# Altium PCB Receptor32DV1.0.PcbDoc
Units mm, origin at the board's own origin, x right, y up, seen from the top; angles counter-clockwise.
Board outline 400 x 50 mm, 2 copper layers (Top Layer, Bottom Layer); 33 components, 88 nets, 160 pads, 31 vias.
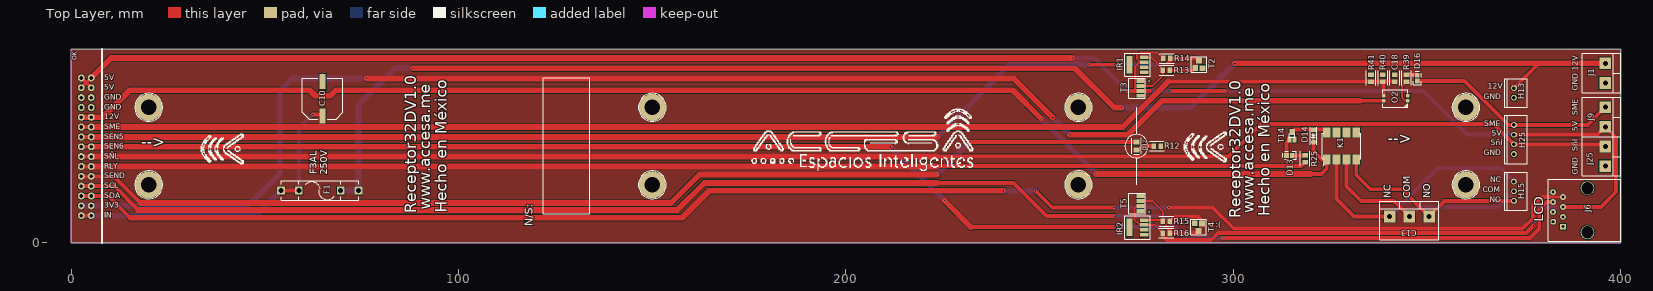
[diagram p0: Top Layer view]
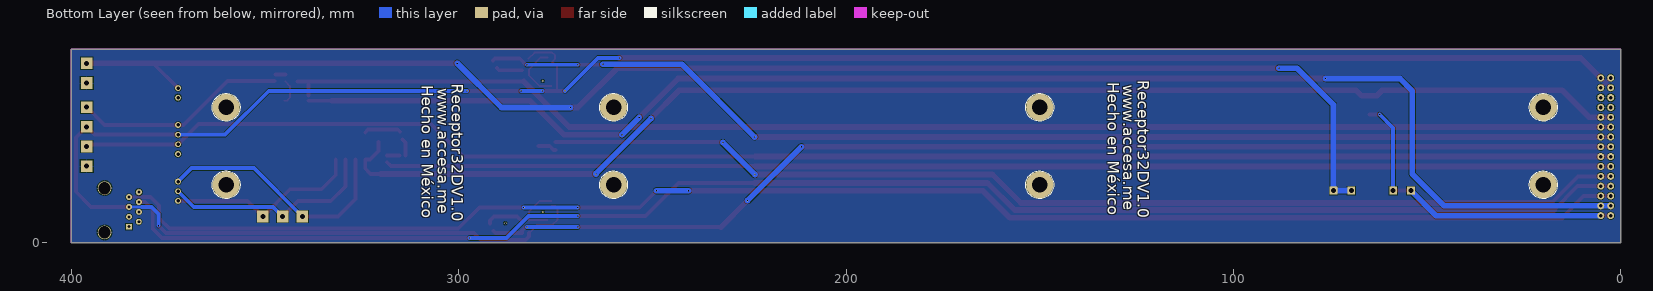
[diagram p1: Bottom Layer view, seen from below]

## Layer stack, top to bottom
Top Solder: solder mask 0.0102, Solder Resist, Dk 3.5
Top Layer: signal copper 0.0356
Dielectric 1: dielectric 0.32, FR-4, Dk 4.8
Bottom Layer: signal copper 0.0356
Bottom Solder: solder mask 0.0102, Solder Resist, Dk 3.5

## Board outline
0,0 400,0 400,50 0,50

## Design rules (kind name [scope] priority, off if disabled: settings)
Clearance [All] p1: gap=0.15
PolygonConnect [All] p1: connectstyle=Relief reliefconductorwidth=0.254 reliefentries=4 polygonreliefangle="90 Angle" airgapwidth=0.254
RoutingVias [All] p1: holewidth=0.3 width=0.5 viastyle="Through Hole" minholewidth=0.3 minwidth=0.4 maxholewidth=0.3 maxwidth=0.4
SolderMaskExpansion [All] p1: expansion=0.102
Width [All] p1: maxlimit=3 minlimit=0.3 preferedwidth=1
30 further rules are at their usual default settings.

## Classes and differential pairs
component class OptoD: C18 D16 J9 O2 R39 R40 R41
component class Relay: C13 D13 D14 H15 K1 R25 T14
component class "Receptor D": IR1 IR2 R13 R14 R15 R16 T2 T3 T4 T5
component class "Leds Indicadores": D12 R12
component class LCD: J6
component class Fuente: C10 F1
component class "Conectores Finales": H13 J1

## Components (designator, comment, footprint, x,y, rotation, side; value= is the part's Value field where it differs from the comment)
C10 "Cap 470uf" "Cap 470uf" 64.897,37.211 r270 top
C13 "Clema 3" Clema3 345.567,6.985 r180 top
C18 "Cap 1uf" "CAP 1UFSMD" 341.63,43.434 r270 top
D12 "Led 0805 Amarillo" "Led 0805 Amarillo" 275,25 r90 top
D13 "LED 0805 SMD" "LED SMD Amarillo" 315.214,22.606 r180 top
D14 "IN4001" C162732 320.675,26.035 r90 top
D16 "LED 0805 SMD" "LED SMD Amarillo" 347.472,41.783 r90 top
F1 "FUSE" FUSE 74.168,11.049 r90 top
H13 "XHP-2 CONECTOR" "CONECTOR 2 PINES" 370.078,42.418 r270 top
H15 "XHP-3 CONECTOR" "CONECTOR XHP-3" 370.078,18.288 r270 top
H25 "Comment" "CONECTOR 4 PINES" 370.078,32.893 r270 top
IR1 "TSMP6000TT" TSMP6000TT 276,46 r90 top
IR2 "TSMP6000TT" TSMP6000TT 276,4 r90 top
J1 "JACK 2IN" "Terminal Blocks 2in" 392.75,48.895 r270 top
J6 "RJ45" "RJ45 PLUG" 381.4,0.508 r0 top
J9 "JACK 2IN" "Terminal Blocks 2in" 392.75,37.592 r270 top
J25 "Comment" "Terminal Blocks 2in" 392.75,27.432 r270 top
K1 "G6K-2F-TR-DC5" RELAY_G6K-2F-TR-DC5 327.914,25.019 r90 top
O2 "TCMT1100" TCMT110 345.059,37.973 r180 top
R12 "Res 49.9 Ohms smd" "RES 49.9 OHMS" 279.4,25 r0 top
R13 "Res 1K smd" "RES 1K" 281.813,44.577 r0 top
R14 "Res 1K smd" "RES 1K" 283.718,47.625 r180 top
R15 "Res 1K smd" "RES 1K" 281.813,5.588 r0 top
R16 "Res 1K smd" "RES 1K" 283.591,2.54 r180 top
R25 "Res 1K smd" "RES 1K" 318.516,20.828 r90 top
R39 "Res 560 Ohms smd" "RES 560" 344.678,43.434 r270 top
R40 "Res 1K smd" "RES 1K" 338.582,43.434 r270 top
R41 "Res 10K smd" "RES 10K" 335.534,43.434 r270 top
T2 "BC847A" BC847A 291.084,47.117 r0 top
T3 "TSMP77000" TSMP77000 276,39.878 r90 top
T4 "BC847A" BC847A 290.957,3.048 r180 top
T5 "TSMP77000" TSMP77000 276,10.16 r90 top
T14 "TRANSISTORS (NPN/PNP) NPN 100MA 45V" C8659 314.071,27.051 r0 top

## Footprints (in the part's own frame and the unit in brackets; to place one, negate y for a bottom-side part, rotate by r counter-clockwise, add the part's x,y. Pads: shape width x height; smd on the part's side, far side on the other; paste and mask are expansions set on the pad)
BC847A [mm]
  rect 1.5x1.5 smd: 1(-0.95,-2) 2(0.95,-2.02) 3(0,0)
  silkscreen extent -2,-3 2,1
C8659 [mm] "TRANSISTORS (NPN/PNP) NPN 100MA 45V SOT-323(SC-70) ROHS"
  rect 1x1.5 smd: 1(0.45,-0.32) 2(1.75,-0.32)
  rect 1.5x1.5 smd: 3(1.1,1.651)
  silkscreen extent 0.38,0.25 1.78,1.14
C162732 [mm] "DIODES - GENERAL PURPOSE 50V 1A 1.1V @ 1A SOD-123F ROHS"
  oct 1.2x1.2 smd: 1(0,0)
  rect 1.2x1.2 smd: 2(3.2,0)
  silkscreen extent -0.64,-0.89 3.81,0.89
"CAP 1UFSMD" [mm] "CL21B105KBFNNNE"
  rect 1.15x1.45 smd: 1(0,0) 2(1.8,0)
  silkscreen extent -1,-1.25 2.8,1.25
"Cap 470uf" [mm] "RVT1V471M1010"
  rect 3x1.5 smd: 1(4,0) 2(-4,0)
  silkscreen extent -5.25,-5.25 5.25,5.25
Clema3 [mm]
  rect 3x3 hole 1.3: 1(-4.945,0.169) 2(0.135,0.169) 3(5.215,0.169)
  silkscreen extent -7.48,-3.83 7.76,6.17, body extent -5.14,-2.98 5.35,3.92, height 8.8
"CONECTOR 2 PINES" [mm] "CONECTOR JTS XH 2 PINES"
  round 1.5 hole 0.9: 1(2.45,2.35) 2(4.95,2.35)
  silkscreen extent 0,0 7.4,5.75
"CONECTOR 4 PINES" [mm] "JST XHP-4"
  round 1.5 hole 0.9: 1(2.45,2.35) 2(4.95,2.35) 3(7.45,2.35) 4(9.95,2.35)
  silkscreen extent 0,0 12.4,5.75
"CONECTOR XHP-3" [mm] "JST XHP-3"
  round 1.5 hole 0.9: 1(2.45,2.35) 2(4.95,2.35) 3(7.45,2.35)
  silkscreen extent 0,0 9.9,5.75
FUSE [mm] "FUSIBLE BASE"
  rect 2x2 hole 1.3: 1(2.453,4.6) 1(2.453,0) 2(2.453,15.4) 2(2.453,20)
  silkscreen extent -0.05,0 4.95,20, body extent -1.02,-0.33 5.97,20.48, height 9.99
"Led 0805 Amarillo" [mm] "NCD0805Y1"
  rect 1.3x1.5 smd: 1(-1,0) 2(1,0)
  silkscreen extent -2.1,-1.2 2,1.2
"LED SMD Amarillo" [mm]
  rect 1.2x1.25 smd: 1(0,0) 2(1.5,0)
  silkscreen extent -1,-1 2.5,1
RELAY_G6K-2F-TR-DC5 [mm]
  rect 2.5x2 smd: 1(-3.5,3.81) 2(-3.5,1.27) 3(-3.5,-1.27) 4(-3.5,-3.81) 5(3.5,-3.81) 6(3.5,-1.27) 7(3.5,1.27) 8(3.5,3.81)
  silkscreen extent -4.94,-5 3.25,5
"RES 1K" [mm]
  rect 1.15x1.45 smd: 1(0,0) 2(1.8,0)
  silkscreen extent -1,-1.25 2.8,1.25
"RES 10K" [mm]
  rect 1.15x1.45 smd: 1(0,0) 2(1.8,0)
  silkscreen extent -1,-1.25 2.8,1.25
"RES 49.9 OHMS" [mm] "0805W8F499JT5E"
  rect 1.15x1.45 smd: 1(0,0) 2(1.8,0)
  silkscreen extent -1,-1.25 2.8,1.25
"RES 560" [mm] "0805W8F5600T5E"
  rect 1.15x1.45 smd: 1(0,0) 2(1.8,0)
  silkscreen extent -1,-1.25 2.8,1.25
"RJ45 PLUG" [mm] "Modular Connectors / Ethernet Connectors 8 PCB"
  rect 1.524x1.524 hole 0.762: 1(3.675,3.675)
  round 1.524 hole 0.762: 2(1.15,4.95) 3(3.675,6.225) 4(1.125,7.5) 5(3.675,8.775) 6(1.125,10.05) 7(3.675,11.325) 8(1.125,12.6)
  round 3.5 hole 3.2: 9(10,2.2) 9(10,13.65)
  silkscreen extent -0.15,-0.05 18.6,15.9, body extent 0.12,0.51 17.62,15.54, height 12.71
TCMT110 [mm] "TCMT1100"
  rect 0.9x0.9 smd: 1(0,1.27) 2(0,0) 3(6.3,0) 4(6.3,1.27)
  silkscreen extent 0,-1.5 6.5,3
"Terminal Blocks 2in" [mm] "Pluggable Terminal Blocks WR-TBL Mod312 5.08mm 2Pin Opn Hztl PCBHdr"
  rect 3x3 hole 1.3: 1(2.54,3.25) 2(7.62,3.25)
  silkscreen extent 0,-2.75 10.16,7.25, body extent 1.68,-1.38 8.67,5.53, height 8.8
TSMP6000TT [mm]
  rect 0.9x2.2 smd: 1(-1.905,-1) 2(-0.635,-1) 3(0.635,-1) 4(1.905,-1)
  rect 4.5x1.5 smd: 1(0,2.8)
  silkscreen extent -3,-2.5 3,4
TSMP77000 [mm] "TSMP77000"
  rect 1x2 smd: 1(-1.905,0) 2(-0.635,0) 3(0.635,0) 4(1.905,0)
  silkscreen extent -2.6,-1.2 2.6,3

## Part data
C10: "RVT1V471M1010"
C13: library part Clema3
D12: "NCD0805Y1"
D13 D16: "LED 0805 Yellow"
D14: library part C162732, "DIODES - GENERAL PURPOSE 50V 1A 1.1V @ 1A SOD-123F ROHS"
F1: library part "FUSE HOLDER"
H13: library part B2B-XH-A(LF)(SN), "CONECTOR JST-XH 2 PINES"
H15: library part B3B-XH-A(LF)(SN), "CONECTOR JST-XH 3 PINES"
J1 J9: "Pluggable Terminal Blocks WR-TBL Mod312 5.08mm 2Pin Opn Hztl PCBHdr"
J6: "Modular Connectors / Ethernet Connectors 8 PCB TOP ENTRY"
K1: "Telecom Relay DPDT (2 Form C) Surface Mount"
O2: library part TCMT110
R39: "Res 560 ohms smd"
R41: "10K"
T14: library part C8659, "TRANSISTORS (NPN/PNP) NPN 100MA 45V SOT-323(SC-70) ROHS"

## Free pads (board coordinates)
  oct 0.5x0.5 hole 0.3: 0(287.909,5.08) 2(278.257,8.001) 3(278.257,41.783)
  rect 1.5x1.5 smd: 8(64.897,42.799) 9(64.897,31.623)
  round 4 hole 4: 10(20,15) 11(20,35) 12(150,35) 13(150,15) 14(260,35) 15(260,15) 16(360,35) 17(360,15)
  round 7 smd: 18(20,15) 19(20,35) 20(150,15) 20(150,35) 20(260,15) 20(260,35) 20(360,15) 20(360,35)
  round 7 smd far side: 21(20,15) 22(20,35) 23(150,15) 24(150,35) 25(260,15) 26(260,35) 27(360,15) 28(360,35)
  round 1.8 hole 0.95: 30(5.164,42.588) 31(5.164,40.048) 32(5.164,37.508) 33(5.164,34.968) 34(5.164,32.428) 35(5.164,29.9) 36(5.164,27.36) 37(5.164,24.82) 38(5.164,22.28) 39(5.164,19.74) 40(5.164,17.188) 41(5.164,14.648) 42(5.164,12.108) 43(5.164,7.028) 44(5.164,9.568) 45(2.6,7.028) 46(2.6,9.568) 47(2.6,12.108) 48(2.6,14.648) 49(2.6,17.188) 50(2.6,19.74) 51(2.6,22.28) 52(2.6,24.82) 53(2.6,27.36) 54(2.6,29.9) 55(2.6,32.428) 56(2.6,34.968) 57(2.6,37.508) 58(2.6,40.048) 59(2.6,42.588)

## Via types
v1: diameter 0.4, hole 0.3, Top Layer to Bottom Layer, tented both sides, 29 vias
v2: diameter 0.4, hole 0.3, Top Layer to Bottom Layer, 2 vias

## Nets (pads, with @x,y where several pads share a name; then routed paths per layer and width w, separated by ;. In a path a pad name is that pad's centre, name@x,y a point inside that pad or via, vN(x,y) a via of type N, cw(c..) or ccw(c..) an arc to the next point about the centre after c; other vN are vias at no path point)
3V3: O2.4 pad.44 pad.46 | length 372
  Top Layer w1: 332.74,36.703 O2.4
  Top Layer w1.5: v1(76.2,42.418) 243.332,42.418 v1(253.365,32.385) ; v1(257.81,27.94) 272.796,27.94 281.559,36.703 332.74,36.703
  Bottom Layer w1.5: pad.46 pad.44 45.636,9.568 53.848,17.78 53.848,39.243 57.023,42.418 v1(76.2,42.418) ; v1(253.365,32.385) v1(257.81,27.94)
12V: D14.1 K1.1 pad.34 pad.55 | length 344.2
  Top Layer w1: 320.04,17.78 322.707,17.78 324.104,19.177 K1.1 322.905,21.519 320.675,23.749 D14.1
  Top Layer w1.5: pad.55 pad.34 8.171,32.428 15.143,39.4 61.566,39.4 62.993,37.973 66.929,37.973 68.356,39.4 243.048,39.4 v1(250.317,32.131) ; v1(264.541,17.78) 320.04,17.78
  Bottom Layer w1.5: v1(250.317,32.131) 264.541,17.907 v1(264.541,17.78)
12VIN: C10.1 F1.2 pad.9 pad.43 pad.45 | length 82.5
  Top Layer w1: pad.45 pad.43 ; F1.2@54.168,13.502 F1.2@58.768,13.502 ; v1(62.23,33.147) C10.1@64.833,33.147
  Bottom Layer w1: F1.2@58.768,13.502 58.768,29.685 v1(62.23,33.147)
  Bottom Layer w1.5: pad.43 47.694,7.028 F1.2@54.168,13.502
12VINF: F1.1 H13.1 J1.1 | length 370.5
  Top Layer w1: H13.1 378.815,46.355
  Top Layer w1.5: v1(88.265,45.085) 259.08,45.085 269.24,34.925 v1(271.145,34.925) ; v1(300.355,46.355) 378.815,46.355 J1.1
  Bottom Layer w1.5: F1.1@69.568,13.502 74.168,13.502 74.168,35.687 83.566,45.085 v1(88.265,45.085) ; v1(271.145,34.925) 288.925,34.925 v1(300.355,46.355)
ACTIVITY: 
BOOT: 
BUZZER: 
CS: 
D+: 
D-: 
DTR: 
EN: 
GND: C10.2 C18.1 H13.2 H25.4 IR1.1 IR2.1 J1.2 J6.8 J6.9 J25.2 O2.2 pad.0 pad.2 pad.3 pad.8 pad.32 pad.33 pad.56 pad.57 R12.2 R40.1 R41.1 T2.2 T3.1 T3.4 T4.2 T5.1 T5.4 T14.2
LINK: 
MISO: 
MOSI: 
NetB1_2: 
NetB2_2: 
NetB2_3: 
NetB2_5: 
NetB2_6: 
NetB2_8: 
NetB2_9: 
NetB2_12: 
NetC9_1: 
NetC13_1: C13.1 H15.3 K1.4 | length 50.8
  Top Layer w1: K1.4 331.724,17.526 335.407,13.843 343.485,13.843 C13.1 354.534,10.838 H15.3
NetC13_2: C13.2 H15.2 K1.3 | length 56.1
  Top Layer w1: K1.3 329.184,14.605 332.994,10.795 341.453,10.795 C13.2
  Bottom Layer w1: C13.2 347.887,9.271 368.361,9.271 H15.2
NetC13_3: C13.3 H15.1 K1.2 | length 64.5
  Top Layer w1: K1.2 326.644,11.303 331.131,6.816 C13.3
  Bottom Layer w1: C13.3 352.84,19.304 368.962,19.304 H15.1
NetD2_2: 
NetD3_2: 
NetD4_2: 
NetD6_2: 
NetD7_1: 
NetD8_1: 
NetD9_1: 
NetD10_1: 
NetD11_1: 
NetD12_1: D12.1 R12.1 | length 4.8
  Top Layer w1: D12.1 275.46,24 276.46,25 R12.1
NetD13_1: D13.1 R25.2 | length 3.3
  Top Layer w1: D13.1 R25.2@318.494,22.606
NetD13_2: D13.2 T14.1 | length 4.5
  Top Layer w1: D13.2 313.714,25.924 T14.1
NetD14_2: D14.2 K1.8 T14.3 | length 9.5
  Top Layer w1: T14.3 315.704,29.235 D14.2 323.388,29.235 K1.8
NetD15_2: 
NetD16_2: D16.2 R39.1 | length 2.6
  Top Layer w1: R39.1 D16.2@347.321,43.434
NetH16_7: 
NetIR1_4: IR1.4 R13.1 T3.3 | length 14.7
  Top Layer w0.5: T3.3 279.146,40.513 281.813,43.18 R13.1 281.813,44.831 278.739,47.905 IR1.4
NetIR2_4: IR2.4 R15.1 T5.3 | length 14
  Top Layer w0.5: T5.3 279.146,10.795 281.813,8.128 R15.1 ; IR2.4 R15.1@281.496,5.905
NetIR3_4: 
NetIR4_4: 
NetIR5_4: 
NetIR6_4: 
NetO1_1: 
NetO2_1: O2.1 R39.2 | length 6.5
  Top Layer w0.5: R39.2 343.535,40.491 343.535,37.465 344.297,36.703 O2.1
NetR1_2: 
NetR13_2: R13.2 T2.1 | length 6.7
  Top Layer w1: R13.2 289.594,44.577 T2.1
NetR15_2: R15.2 T4.1 | length 10
  Top Layer w1: R15.2 284.883,6.858 290.83,6.858 291.907,5.781 T4.1
NetR17_2: 
NetR19_2: 
NetR21_2: 
NetR23_2: 
NetR34_2: 
PULSOMAG: 
PULSOMAG2: D16.1 H25.1 J9.1 | length 55.1
  Top Layer w1: D16.1 359.664,41.783 371.004,30.443 H25.1 391.391,30.443 J9.1
RELAY: pad.39 pad.50 R25.1 | length 318.2
  Top Layer w1: pad.50 pad.39 ; 221.615,19.812 317.5,19.812 R25.1
  Top Layer w1.5: pad.39 223.448,19.74
RST: 
RSTCONTA: 
RTS: 
RXD: 
RXUSB: 
SCL: J6.6 pad.41 pad.48 | length 398
  Top Layer w1: pad.48 pad.41 11.133,14.648 17.272,8.509 ; 223.52,15.494 243.205,15.494 251.714,6.985 v1(269.24,6.985) ; v1(297.18,1.27) 376.555,1.27 378.968,3.683 378.968,8.636 380.89,10.558 J6.6
  Top Layer w1.5: 17.272,8.509 156.464,8.509 163.449,15.494 223.52,15.494
  Bottom Layer w1: v1(269.24,6.985) 281.94,6.985 287.655,1.27 v1(297.18,1.27)
SDA: J6.7 pad.42 pad.47 | length 397.1
  Top Layer w0.7: 381.803,11.833 J6.7
  Top Layer w1: pad.47 pad.42 9.609,12.108 15.24,6.477 ; v1(248.92,13.462) 253.238,9.144 v1(269.24,9.144) ; v1(283.21,9.144) 294.64,9.144 300.094,3.69 374.65,3.69 377.317,6.357 377.317,9.652 379.498,11.833 381.803,11.833
  Top Layer w1.5: 15.24,6.477 157.734,6.477 164.719,13.462 v1(240.665,13.462)
  Bottom Layer w1: v1(269.24,9.144) v1(283.21,9.144)
  Bottom Layer w1.5: v1(240.665,13.462) v1(248.92,13.462)
SEND: D12.2 pad.40 pad.49 | length 281.7
  Top Layer w1: pad.49 pad.40 11.006,17.188 17.907,10.287 ; v2@231.775,26 D12.2
  Top Layer w1.5: 17.907,10.287 154.813,10.287 162.179,17.653 v1(223.52,17.653)
  Bottom Layer w1.5: v1(223.52,17.653) v2(231.775,25.908)
SENM: 
SENMAG: 
SENMAGD: C18.2 O2.3 pad.35 pad.54 R40.2 R41.2 | length 402.9
  Top Layer w1: pad.54 pad.35 ; 215.9,29.972 271.526,29.972 ; 283.188,41.634 R41.2 R40.2 C18.2 ; O2.3 R40.2@338.759,41.457
  Top Layer w1.5: pad.35 271.454,29.9 ; 271.526,29.972 283.188,41.634
SENSOR1: 
SENSOR2: 
SENSOR3: 
SENSOR4: 
SENSOR5: pad.36 pad.53 R14.1 T2.3 | length 297.2
  Top Layer w1: pad.53 pad.36 ; v1(262.763,46.101) 262.89,45.974 v1(269.24,45.974) ; v1(282.321,45.974) 282.575,45.974 284.226,47.625 290.576,47.625 T2.3
  Top Layer w1.5: pad.36 v1(223.592,27.36)
  Bottom Layer w1: v1(269.24,45.974) v1(282.321,45.974)
  Bottom Layer w1.5: v1(223.592,27.36) 242.333,46.101 v1(262.763,46.101)
SENSOR6: pad.37 pad.52 R16.1 T4.3 | length 298.2
  Top Layer w1: pad.52 pad.37 ; 232.283,4.064 v1(269.24,4.064) ; v1(282.321,4.064) 282.702,4.064 283.591,3.175 R16.1 290.449,2.54 T4.3
  Top Layer w1.5: pad.37 v1(211.51,24.82) ; v1(225.425,10.922) 232.283,4.064
  Bottom Layer w1: v1(269.24,4.064) v1(282.321,4.064)
  Bottom Layer w1.5: v1(211.51,24.82) 225.408,10.922 v1(225.425,10.922)
SENU: 
SKC: 
STATUS: 
SUSPEND: 
SñL: H25.3 J25.1 pad.38 pad.51 | length 398.4
  Top Layer w1: pad.51 pad.38 ; 223.52,22.352 298.704,22.352 307.086,30.734 367.137,30.734 H25.3 J25.1@395.449,25.443
  Top Layer w1.5: pad.38 223.448,22.28
TXD: 
TXUSB: 
V5V: H25.2 IR1.3 IR2.3 J6.5 J9.2 pad.30 pad.31 pad.58 pad.59 R14.2 R16.2 T3.2 T5.2 | length 584
  Top Layer w0.5: 274.955,39.243 274.574,39.624 274.574,45.466 275.743,46.635 275.945,46.635 275.082,47.498 275.082,48.387 275.844,49.149 280.394,49.149 R14.2 ; T5.2 274.955,9.525 274.447,9.017 274.447,5.969 275.781,4.635 IR2.3 279.696,4.635 R16.2
  Top Layer w1: pad.58@2.624,40.048 pad.58 3.882,41.33 ; pad.59@2.624,42.588 3.882,41.33 ; pad.31 3.882,41.33 ; pad.30 5.14,42.588 3.882,41.33 ; v1(272.542,39.243) 274.955,39.243 T3.2 v1(278.384,39.243) ; R16.2 281.791,1.673 282.687,0.777 294.274,0.777 296.037,2.54 375.539,2.54 v2(377.444,4.445) ; v1(283.845,39.243) v1(297.815,39.243) ; H25.2 393.971,27.943 J9.2 398.78,27.192 398.78,13.208 394.855,9.283 J6.5
  Top Layer w1.5: pad.30 10.328,47.752 v1(258.445,47.752)
  Bottom Layer w0.7: 381.803,9.283 J6.5
  Bottom Layer w1: v1(258.445,47.752) 264.033,47.752 v1(272.542,39.243) ; v1(278.384,39.243) v1(283.845,39.243) ; v1(297.815,39.243) 348.996,39.243 360.296,27.943 H25.2 ; v2(377.444,4.445) 377.444,7.493 379.234,9.283 381.803,9.283
pads on no net: IR1.2 IR2.2 J6.1 J6.2 J6.3 J6.4 K1.5 K1.6 K1.7

## Polygon pours and split planes (outlines as drawn)
GND on Top Layer "Top Layer-No Net" (solid, pour order 4): 0,50 0,0 400,0 400,50
GND on Bottom Layer "Top Layer-No Net" (solid, pour order 6): 400,50 400,0 0,0 0,50

## Keep-outs
Keep-Out Layer:
  the board outline again, w0.254

## Silkscreen, mask and mechanical layers (free items; w line width, h text height)
Top Overlay:
  drawing of 77 lines, arcs and shapes, not listed
  text "OK" at 1.778,47.117 h2 r90
  text "12V" at 389.362,44.45 h2.5 r90
  text "5V" at 8.548,41.529 h2.5
  text "12V" at 365.633,39.243 h2.5
  text "GND" at 389.382,39.243 h2.5 r90
  text "5V" at 8.548,38.989 h2.5
  text "GND" at 364.62,36.576 h2.5
  text "GND" at 8.548,36.449 h2.5
  text "GND" at 8.548,33.909 h2.5
  text "SME" at 389.382,32.893 h2.5 r90
  text "12V" at 8.548,31.369 h2.5
  text "SME" at 364.744,29.591 h2.5
  text "SME" at 8.548,28.829 h2.5
  text "5V" at 389.355,28.829 h2.5 r90
  text "5V" at 366.748,27.178 h2.5
  text "SEN5" at 8.548,26.289 h2.5
  text "Sñl" at 366.397,24.638 h2.5
  text "-->" at 339.852,24.511 h5
  text "SEN6" at 8.548,23.749 h2.5
  text "-->" at 18.034,23.622 h5
  text "Sñl" at 389.382,23.622 h2.5 r90
  text "GND" at 364.641,22.098 h2.5
  text "SÑL" at 8.548,21.209 h2.5
  text "RLY" at 8.548,18.669 h2.5
  text "F3AL" at 64.008,17.78 h3 r90
  text "250V" at 66.802,17.653 h3 r90
  text "GND" at 389.382,17.653 h2.5 r90
  text "SEND" at 8.548,16.129 h2.5
  text "NC" at 366.33,15.113 h2.5
  text "SCL" at 8.548,13.589 h2.5
  text "COM" at 364.363,12.573 h2.5
  text "NC" at 341.249,11.557 h3 r90
  text "COM" at 346.329,11.557 h3 r90
  text "NO" at 351.409,11.557 h3 r90
  text "SDA" at 8.548,11.049 h2.5
  text "NO" at 366.218,10.033 h2.5
  text "3V3" at 8.548,8.509 h2.5
  text "www.accesa.me" at 93.726,8.509 h5 r90
  text "Hecho en México" at 97.917,7.747 h5 r90
  text "Receptor32DV1.0" at 90.043,7.62 h5 r90
  text "www.accesa.me" at 306.324,7.62 h5 r90
  text "Hecho en México" at 310.388,6.858 h5 r90
  text "Receptor32DV1.0" at 302.895,6.35 h5 r90
  text "IN" at 8.548,5.969 h2.5
  text "LCD" at 380.746,5.461 h4 r90
  text "N/S:" at 119.888,4.318 h3.5 r90
  text ":(" at 295.402,3.556 h2.5
Bottom Overlay:
  circle w0.254: c360,15 r3.6
  circle w0.254: c360,35 r3.6
  circle w0.254: c260,35 r3.6
  circle w0.254: c260,15 r3.6
  circle w0.254: c150,35 r3.6
  circle w0.254: c150,15 r3.6
  circle w0.254: c20,15 r3.6
  circle w0.254: c20,35 r3.6
  text "Receptor32DV1.0" at 125.73,42.037 h5 r90
  text "Hecho en México" at 133.477,41.529 h5 r90
  text "Receptor32DV1.0" at 302.768,41.148 h5 r90
  text "www.accesa.me" at 129.413,40.767 h5 r90
  text "Hecho en México" at 310.515,40.64 h5 r90
  text "www.accesa.me" at 306.451,39.878 h5 r90